# Altium PCB PC104_Breakout_Board.PcbDoc
Units mm, origin at the board's own origin, x right, y up, seen from the top; angles counter-clockwise.
Board outline 97.66 x 90.3 mm, 2 copper layers (Top Layer, Bottom Layer), stack 1.591 mm thick; 64 components, 67 nets, 295 pads, 54 vias.
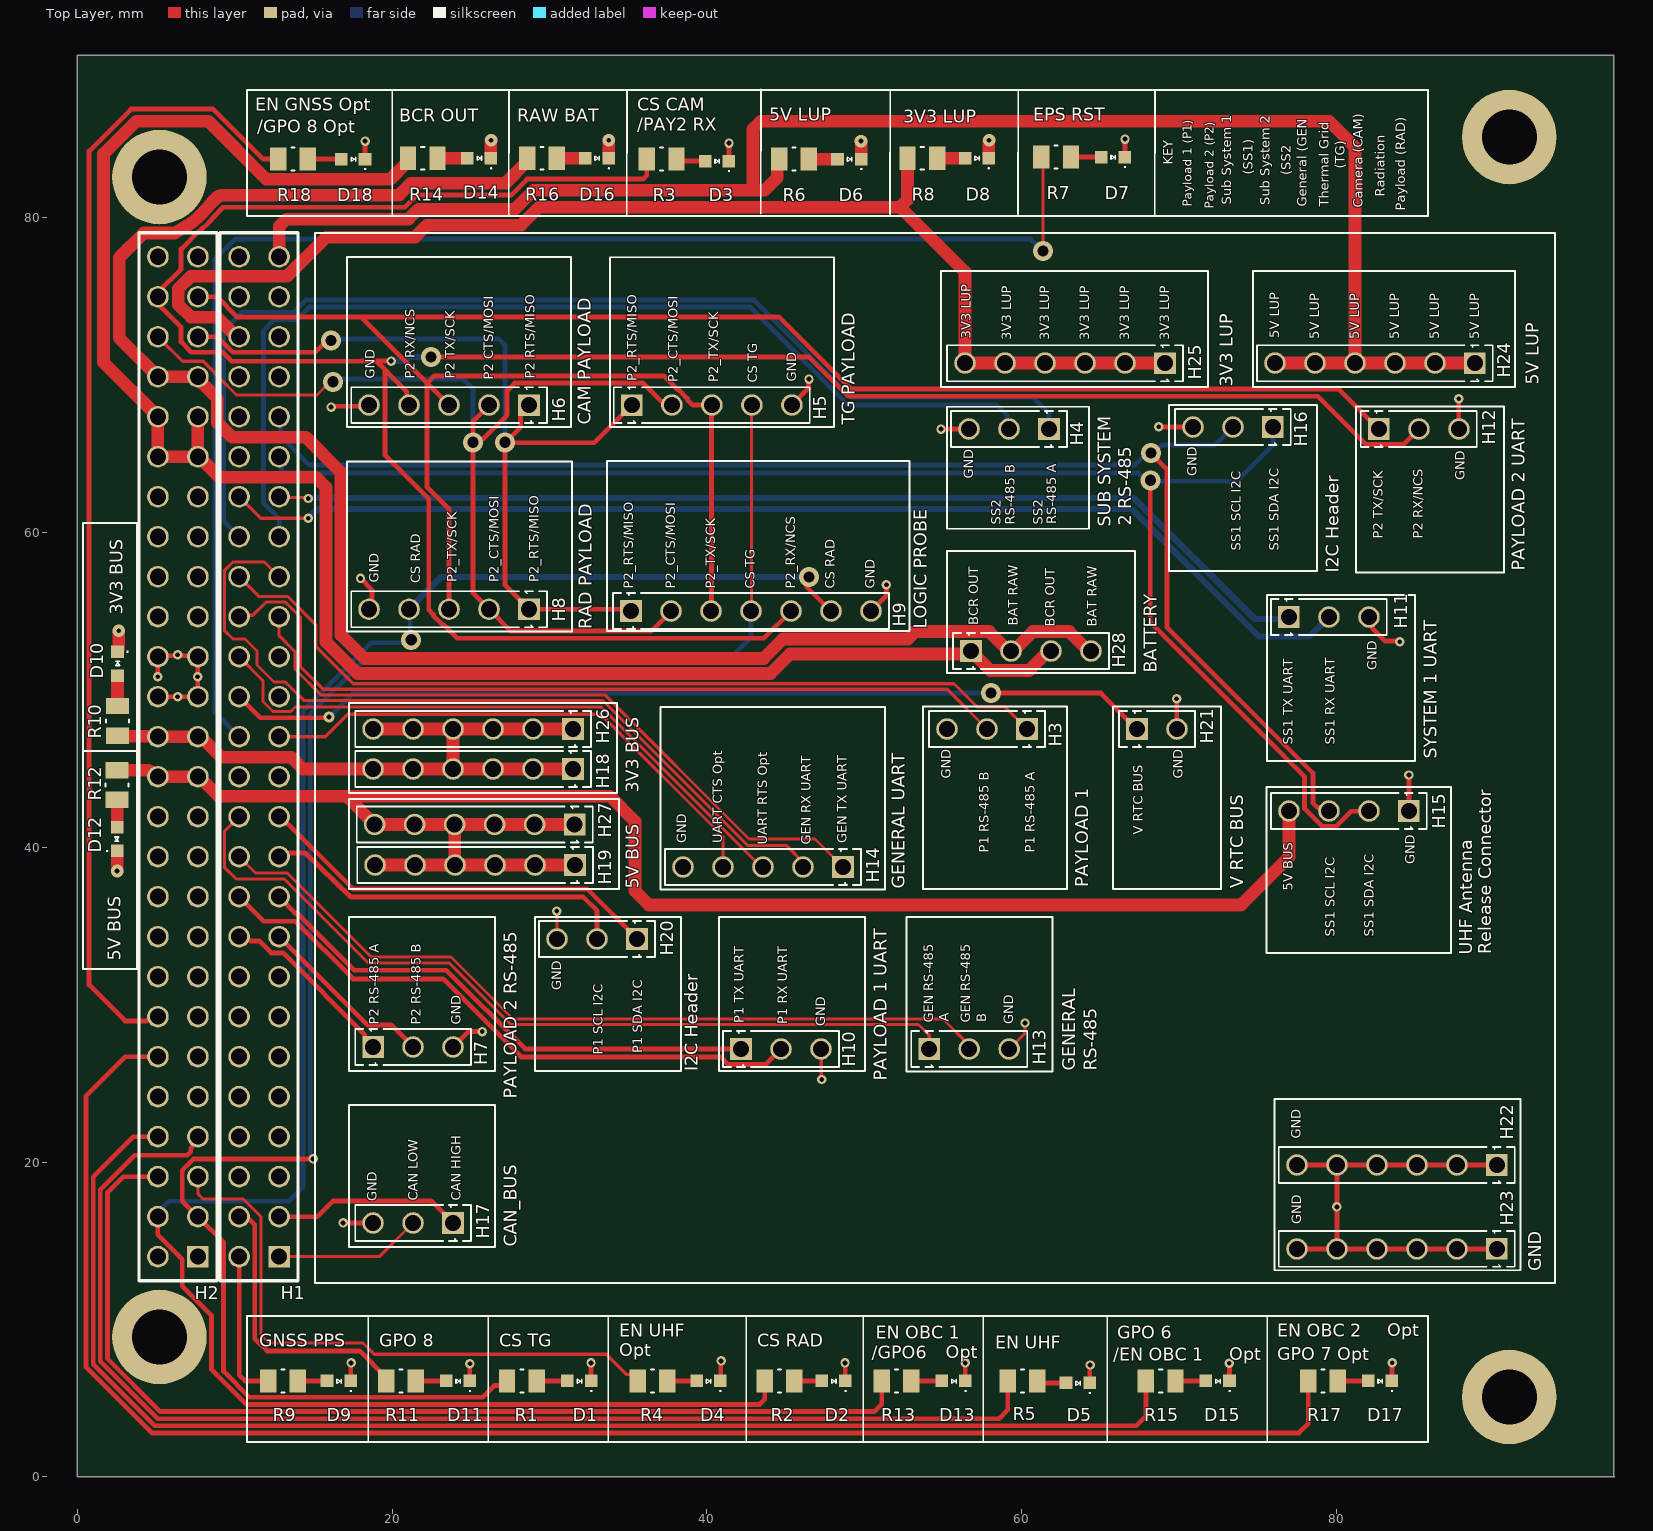
[diagram p0: Top Layer view]
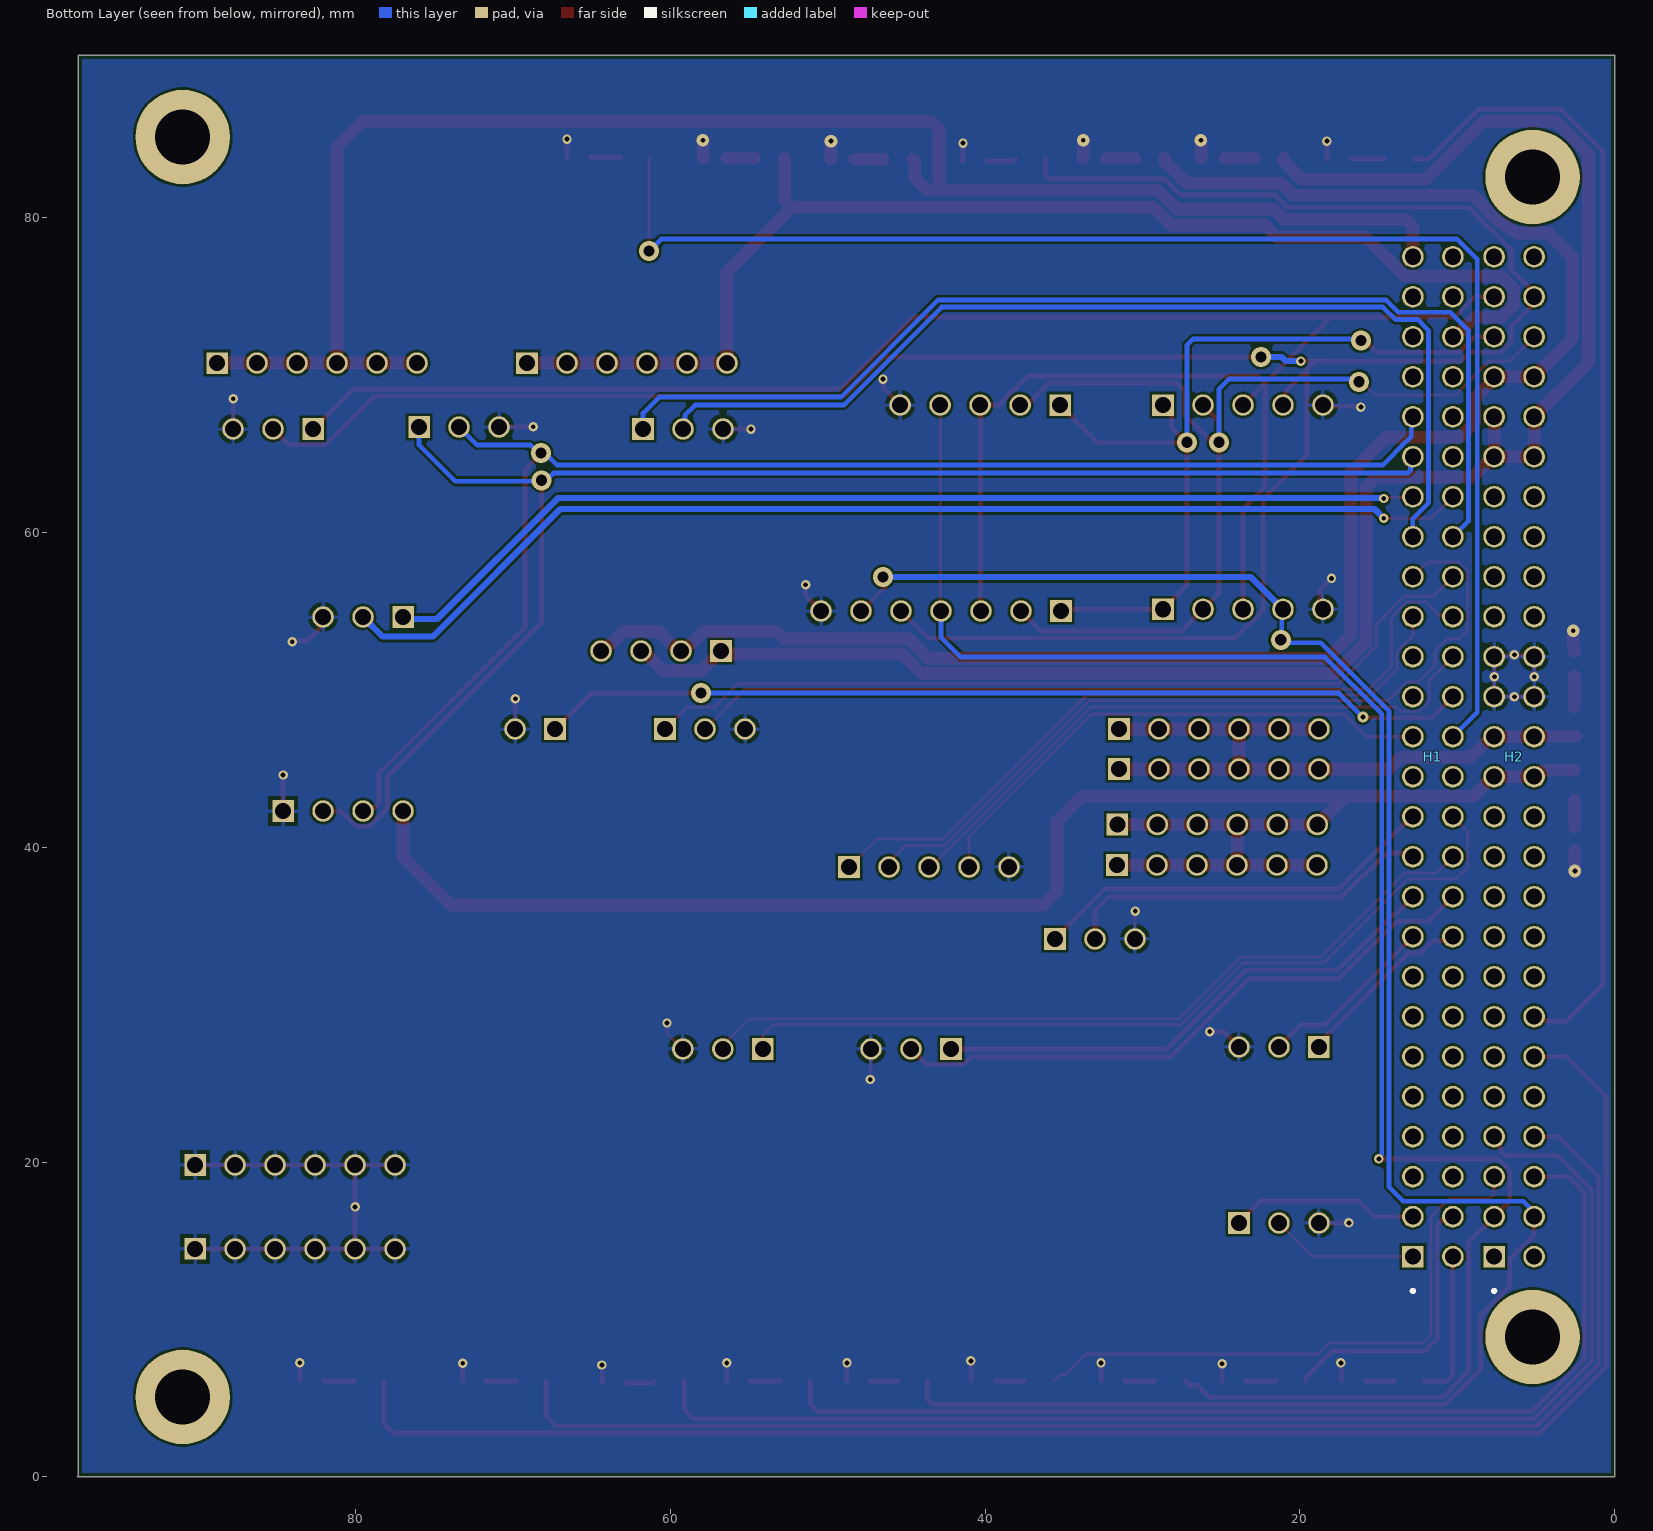
[diagram p1: Bottom Layer view, seen from below]
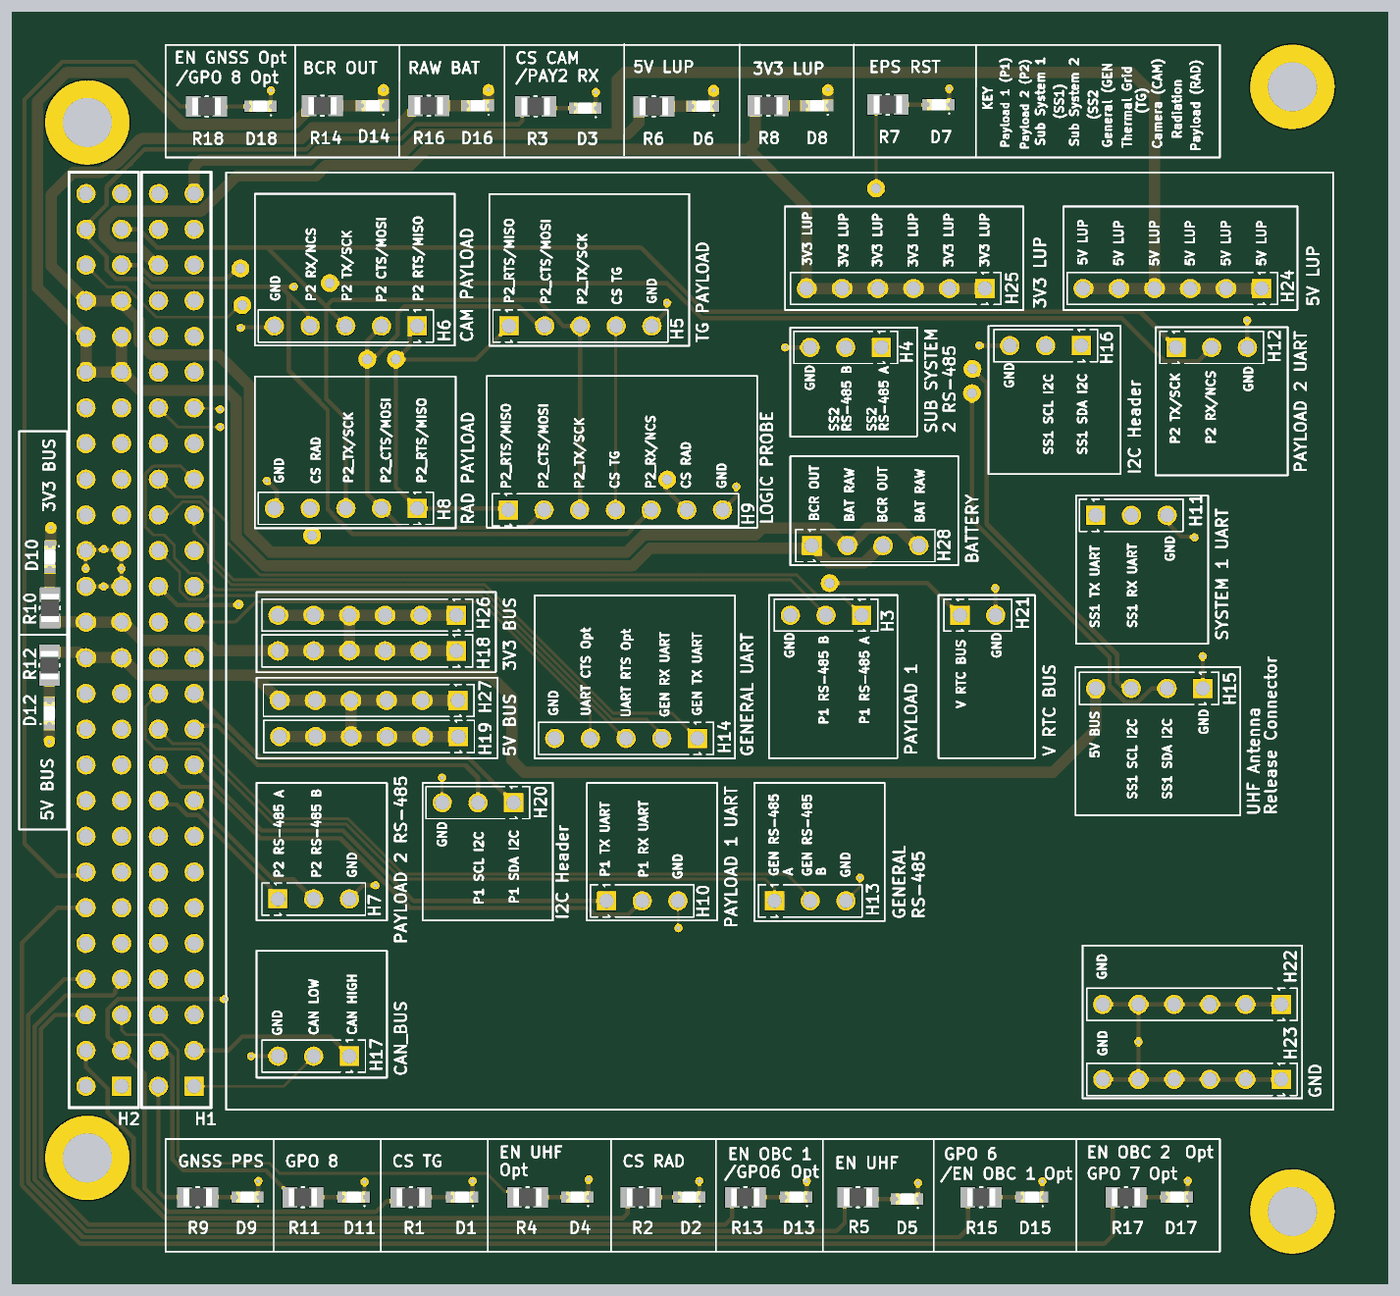
[diagram p2: 3D render of the assembled board from above, using the file's embedded part models]

## Layer stack, top to bottom
Top Solder: solder mask 0.0102, Solder Resist, Dk 3.5
Top Layer: signal copper 0.0356
Dielectric 1: dielectric 1.52, FR-4, Dk 4.8
Bottom Layer: signal copper 0.0356
Bottom Solder: solder mask 0.0102, Solder Resist, Dk 3.5

## Board outline
0,0 0,90.297 97.6,90.297 97.6,0.063 97.663,0

## Design rules (kind name [scope] priority, off if disabled: settings)
BoardOutlineClearance [All] p1: gap=0.254 ignorepadtopadclearanceinfootprint=FALSE except(0: Arc-SplitContinuation Track-SplitContinuation SMDPad-SplitContinuation THPad-SplitContinuation Via-SplitContinuation Fill-SplitContinuation Poly-SplitContinuation Region-SplitContinuation Text-SplitContinuation)
Clearance [All] p1: gap=0.152 ignorepadtopadclearanceinfootprint=FALSE
HoleSize [All] p1: absolutevalues=TRUE maxlimit=6.2 minlimit=0.3 maxpercent=80.000 minpercent=20.000
MinimumAnnularRing [All] p1: minimumring=0.15
MinimumSolderMaskSliver [All] p1: minsoldermaskwidth=0.1
PolygonConnect ViaConnect [IsVia] p1: connectstyle=Direct reliefconductorwidth=0.254 reliefentries=4 polygonreliefangle="90 Angle" airgapwidth=0.254
PolygonConnect [All] p2: connectstyle=Relief reliefconductorwidth=0.254 reliefentries=4 polygonreliefangle="90 Angle" airgapwidth=0.254
RoutingVias [All] p1: holewidth=0.3 width=0.6 viastyle="Through Hole" minholewidth=0.3 minwidth=0.5 maxholewidth=1 maxwidth=5
SilkToSilkClearance [All] p1: silktosilkclearance=0.1
SilkToSolderMaskClearance [IsPad] p1: minsilkscreentomaskgap=0.1 clearancetoexposedcopper=TRUE
SolderMaskExpansion [All] p1: expansion=0.051 istentingtop=FALSE
SupplyNets "Schematic Supply Nets_3" [InNet('5V_BUS')] p1: voltage=0.000
SupplyNets "Schematic Supply Nets_2" [InNet('3V3_BUS')] p2: voltage=0.000
SupplyNets "Schematic Supply Nets" [InNet('GND')] p3: voltage=0.000
Width [All] p1: maxlimit=0.8 minlimit=0.2 preferedwidth=0.4 toplayer_prefwidth=0.3 bottomlayer_minwidth=0.3 minimp=50.000000 maximp=50.000000 favimp=50.000000
26 further rules are at their usual default settings.

## Components (designator, comment, footprint, x,y, rotation, side; value= is the part's Value field where it differs from the comment)
D1 "LTST-C190 Series" LED_0603_1608M_0.80mm 31.892,6.096 r180 top
D2 "LTST-C190 Series" LED_0603_1608M_0.80mm 48.044,6.096 r180 top
D3 "LTST-C190 Series" LED_0603_1608M_0.80mm 40.64,83.566 r180 top
D4 "LTST-C190 Series" LED_0603_1608M_0.80mm 40.093,6.096 r180 top
D5 "LTST-C190 Series" LED_0603_1608M_0.80mm 63.554,5.969 r180 top
D6 "LTST-C190 Series" LED_0603_1608M_0.80mm 49.043,83.693 r180 top
D7 "LTST-C190 Series" LED_0603_1608M_0.80mm 65.789,83.82 r180 top
D8 "LTST-C190 Series" LED_0603_1608M_0.80mm 57.144,83.745 r180 top
D9 "LTST-C190 Series" LED_0603_1608M_0.80mm 16.625,6.096 r180 top
D10 "LTST-C190 Series" LED_0603_1608M_0.80mm 2.569,51.643 r270 top
D11 "LTST-C190 Series" LED_0603_1608M_0.80mm 24.19,6.096 r180 top
D12 "LTST-C190 Series" LED_0603_1608M_0.80mm 2.54,40.513 r90 top
D13 "LTST-C190 Series" LED_0603_1608M_0.80mm 55.667,6.096 r180 top
D14 "LTST-C190 Series" LED_0603_1608M_0.80mm 25.53,83.745 r180 top
D15 "LTST-C190 Series" LED_0603_1608M_0.80mm 72.438,6.096 r180 top
D16 "LTST-C190 Series" LED_0603_1608M_0.80mm 33.014,83.745 r180 top
D17 "LTST-C190 Series" LED_0603_1608M_0.80mm 82.745,6.096 r180 top
D18 "LTST-C190 Series" LED_0603_1608M_0.80mm 17.535,83.693 r180 top
H1 "ESQ-126-14-G-D" SAMTEC_ESQ-126-14-G-D 10.292,13.989 r270 bottom locked
H2 "ESQ-126-14-G-D" SAMTEC_ESQ-126-14-G-D 5.132,13.989 r270 bottom locked
H3 "HDR,2.54mm,1x3" HEADER_2.54MM_1x3PIN 57.785,47.498 r180 top
H4 "HDR,2.54mm,1x3" HEADER_2.54MM_1x3PIN 59.182,66.548 r180 top
H5 "HDR,2.54mm,1x5" HEADER_2.54MM_1x5PIN 40.313,68.072 r0 top
H6 "HDR,2.54mm,1x5" HEADER_2.54MM_1x5PIN 23.622,68.072 r180 top
H7 "HDR,2.54mm,1x3" HEADER_2.54MM_1x3PIN 21.336,27.305 r0 top
H8 "HDR,2.54mm,1x5" HEADER_2.54MM_1x5PIN 23.622,55.103 r180 top
H9 "HDR,2.54mm,1x7" HEADER_2.54MM_1x7PIN 42.799,54.991 r0 top
H10 "HDR,2.54mm,1x3" HEADER_2.54MM_1x3PIN 44.704,27.178 r0 top
H11 "HDR,2.54mm,1x3" HEADER_2.54MM_1x3PIN 79.502,54.61 r0 top
H12 "HDR,2.54mm,1x3" HEADER_2.54MM_1x3PIN 85.217,66.548 r0 top
H13 "HDR,2.54mm,1x3" HEADER_2.54MM_1x3PIN 56.656,27.178 r0 top
H14 "HDR,2.54mm,1x5" HEADER_2.54MM_1x5PIN 43.561,38.735 r180 top
H15 "HDR,2.54mm,1x4" HEADER_2.54MM_1x4PIN 80.772,42.291 r180 top
H16 "HDR,2.54mm,1x3" HEADER_2.54MM_1x3PIN 73.406,66.675 r180 top
H17 "HDR,2.54mm,1x3" HEADER_2.54MM_1x3PIN 21.336,16.129 r180 top
H18 "HDR,2.54mm,1x6" HEADER_2.54MM_1x6PIN 25.146,44.958 r180 top
H19 "HDR,2.54mm,1x6" HEADER_2.54MM_1x6PIN 25.273,38.862 r180 top
H20 "HDR,2.54mm,1x3" HEADER_2.54MM_1x3PIN 33.02,34.163 r180 top
H21 "HDR,2.54mm,1x2" HEADER_2.54MM_1x2PIN 68.58,47.498 r0 top
H22 "HDR,2.54mm,1x6" HEADER_2.54MM_1x6PIN 83.82,19.812 r180 top
H23 "HDR,2.54mm,1x6" HEADER_2.54MM_1x6PIN 83.82,14.478 r180 top
H24 "HDR,2.54mm,1x6" HEADER_2.54MM_1x6PIN 82.423,70.739 r180 top
H25 "HDR,2.54mm,1x6" HEADER_2.54MM_1x6PIN 62.738,70.739 r180 top
H26 "HDR,2.54mm,1x6" HEADER_2.54MM_1x6PIN 25.146,47.498 r180 top
H27 "HDR,2.54mm,1x6" HEADER_2.54MM_1x6PIN 25.251,41.434 r180 top
H28 "HDR,2.54mm,1x4" HEADER_2.54MM_1x4PIN 60.579,52.451 r0 top
R1 "2.2k" RESISTOR_0805_2012M-50N 28.245,6.096 r0 top
R2 "2.2k" RESISTOR_0805_2012M-50N 44.615,6.096 r0 top
R3 "2.2k" RESISTOR_0805_2012M-50N 37.125,83.693 r0 top
R4 "2.2k" RESISTOR_0805_2012M-50N 36.549,6.096 r0 top
R5 "2.2k" RESISTOR_0805_2012M-50N 60.049,6.096 r0 top
R6 "2.2k" RESISTOR_0805_2012M-50N 45.534,83.693 r0 top
R7 "2.2k" RESISTOR_0805_2012M-50N 62.177,83.82 r0 top
R8 "2.2k" RESISTOR_0805_2012M-50N 53.677,83.745 r0 top
R9 "2.2k" RESISTOR_0805_2012M-50N 13.081,6.096 r0 top
R10 "2.2k" RESISTOR_0805_2012M-50N 2.569,48.016 r90 top
R11 "2.2k" RESISTOR_0805_2012M-50N 20.57,6.096 r0 top
R12 "2.2k" RESISTOR_0805_2012M-50N 2.54,43.942 r270 top
R13 "2.2k" RESISTOR_0805_2012M-50N 52.047,6.096 r0 top
R14 "2.2k" RESISTOR_0805_2012M-50N 21.953,83.745 r0 top
R15 "2.2k" RESISTOR_0805_2012M-50N 68.818,6.096 r0 top
R16 "2.2k" RESISTOR_0805_2012M-50N 29.523,83.745 r0 top
R17 "2.2k" RESISTOR_0805_2012M-50N 79.125,6.096 r0 top
R18 "2.2k" RESISTOR_0805_2012M-50N 13.716,83.693 r0 top

## Footprints (in the part's own frame and the unit in brackets; to place one, negate y for a bottom-side part, rotate by r counter-clockwise, add the part's x,y. Pads: shape width x height; smd on the part's side, far side on the other; paste and mask are expansions set on the pad)
HEADER_2.54MM_1x2PIN [mm]
  rect 1.37x1.37 hole 1.02: 1(-1.27,0)
  round 1.37 hole 1.02: 2(1.27,0)
  silkscreen extent -2.41,-1.14 2.41,1.14, body extent -2.41,-1.14 2.41,1.14, height 8.2
HEADER_2.54MM_1x3PIN [mm]
  rect 1.37x1.37 hole 1.02: 1(-2.54,0)
  round 1.37 hole 1.02: 2(0,0) 3(2.54,0)
  silkscreen extent -3.68,-1.14 3.68,1.14, body extent -3.68,-1.14 3.68,1.14, height 8.2
HEADER_2.54MM_1x4PIN [mm]
  rect 1.37x1.37 hole 1.02: 1(-3.81,0)
  round 1.37 hole 1.02: 2(-1.27,0) 3(1.27,0) 4(3.81,0)
  silkscreen extent -4.95,-1.14 4.95,1.14, body extent -4.95,-1.14 4.95,1.14, height 8.2
HEADER_2.54MM_1x5PIN [mm]
  rect 1.37x1.37 hole 1.02: 1(-5.08,0)
  round 1.37 hole 1.02: 2(-2.54,0) 3(0,0) 4(2.54,0) 5(5.08,0)
  silkscreen extent -6.22,-1.14 6.22,1.14, body extent -6.21,-1.14 6.22,1.14, height 8.2
HEADER_2.54MM_1x6PIN [mm]
  rect 1.37x1.37 hole 1.02: 1(-6.35,0)
  round 1.37 hole 1.02: 2(-3.81,0) 3(-1.27,0) 4(1.27,0) 5(3.81,0) 6(6.35,0)
  silkscreen extent -7.49,-1.14 7.49,1.14, body extent -7.49,-1.14 7.49,1.14, height 8.2
HEADER_2.54MM_1x7PIN [mm]
  rect 1.37x1.37 hole 1.02: 1(-7.62,0)
  round 1.37 hole 1.02: 2(-5.08,0) 3(-2.54,0) 4(0,0) 5(2.54,0) 6(5.08,0) 7(7.62,0)
  silkscreen extent -8.76,-1.14 8.76,1.14, body extent -8.76,-1.14 8.76,1.14, height 8.2
LED_0603_1608M_0.80mm [mm] "LED, 0603 (1608 metric), 0.8mm high"
  rect 0.8x0.8 smd mask+0.051: A(0.75,0) C(-0.75,0)
  silkscreen extent -0.79,-0.12 0.13,0.66, body extent -0.8,-0.4 0.8,0.4, height 0.8
RESISTOR_0805_2012M-50N [mm] "Resistor, 0805 (2012 metric), nominal pads"
  rect 1.04x1.47 smd mask+0.051: 1(-0.94,0) 2(0.94,0)
  silkscreen extent -0.1,-0.72 0.1,0.72, body extent -1,-0.63 1,0.62, height 0.5
SAMTEC_ESQ-126-14-G-D [mm]
  rect 1.37x1.37 hole 1.02: 01(0,-2.54)
  round 1.37 hole 1.02: 02(0,0) 03(-2.54,-2.54) 04(-2.54,0) 05(-5.08,-2.54) 06(-5.08,0) 07(-7.62,-2.54) 08(-7.62,0) 09(-10.16,-2.54) 10(-10.16,0) 11(-12.7,-2.54) 12(-12.7,0) 13(-15.24,-2.54) 14(-15.24,0) 15(-17.78,-2.54) 16(-17.78,0) 17(-20.32,-2.54) 18(-20.32,0) 19(-22.86,-2.54) 20(-22.86,0) 21(-25.4,-2.54) 22(-25.4,0) 23(-27.94,-2.54) 24(-27.94,0) 25(-30.48,-2.54) 26(-30.48,0) 27(-33.02,-2.54) 28(-33.02,0) 29(-35.56,-2.54) 30(-35.56,0) 31(-38.1,-2.54) 32(-38.1,0) 33(-40.64,-2.54) 34(-40.64,0) 35(-43.18,-2.54) 36(-43.18,0) 37(-45.72,-2.54) 38(-45.72,0) 39(-48.26,-2.54) 40(-48.26,0) 41(-50.8,-2.54) 42(-50.8,0) 43(-53.34,-2.54) 44(-53.34,0) 45(-55.88,-2.54) 46(-55.88,0) 47(-58.42,-2.54) 48(-58.42,0) 49(-60.96,-2.54) 50(-60.96,0) 51(-63.5,-2.54) 52(-63.5,0)
  silkscreen extent 2.08,-2.64 2.27,-2.44

## Part data
D1 D2 D3 D4 D5 D6 D7 D8 D9 D10 D11 D12 D13 D14 D15 D16 D17 D18: "Diode - LED, 0603", Package=0603, Rated Voltage="5V Reverse", Temp Range="-30°C ~ 85°C", APSS Standard Part="APSS Standard", Supplier 1=Digikey
H1 H2: Package=None, Availability=Unavailable, MF=Samtec, MP=ESQ-126-14-G-D, Price=None
H3 H4 H7 H10 H11 H12 H13 H16 H17 H20: "Connector - 2.54mm, 1x3-pin"
H5 H6 H8 H14: "Connector - 2.54mm, 1x5-pin"
H9: "Connector - 2.54mm, 1x7-pin"
H15 H28: "Connector - 2.54mm, 1x4-pin"
H18 H19 H22 H23 H24 H25 H26 H27: "Connector - 2.54mm, 1x6-pin"
H21: "Connector - 2.54mm, 1x2-pin"
R1 R2 R3 R4 R5 R6 R7 R8 R9 R10 R11 R12 R13 R14 R15 R16 R17 R18: library part "Generic Resistor", "Passive - Resistor, Generic", Tolerance=5%

## Free pads (board coordinates)
  round 6 hole 3.5 mask+0.102: 4(5.232,8.89) 4(5.232,82.55) 4(90.957,5.08) 4(90.957,85.09)

## Via types
v1: diameter 0.6, hole 0.3, Top Layer to Bottom Layer, 36 vias
v2: diameter 1.27, hole 0.711, Top Layer to Bottom Layer, 11 vias
v3: diameter 0.8, hole 0.3, Top Layer to Bottom Layer, 6 vias
v4: diameter 0.7, hole 0.3, Top Layer to Bottom Layer, 1 vias

## Nets (pads, with @x,y where several pads share a name; then routed paths per layer and width w, separated by ;. In a path a pad name is that pad's centre, name@x,y a point inside that pad or via, vN(x,y) a via of type N, cw(c..) or ccw(c..) an arc to the next point about the centre after c; other vN are vias at no path point)
3V3_BUS: H2.27 H2.28 H18.1 H18.2 H18.3 H18.4 H18.5 H18.6 H26.1 H26.2 H26.3 H26.4 H26.5 H26.6 R10.1 | length 45.1
  Top Layer w0.8: R10.1@2.475,47.043 5.098,47.043 H2.28 H2.27 7.826,47.009 9.129,45.706 13.603,45.706 14.351,44.958 H18.5 H18.4 ; H26.6 H26.5 H26.4 ; H18.1 H18.2 H18.3 H18.4 ; H26.1 H26.2 H26.3 H26.4 ; H18.4 H26.4
3V3_LUP: H1.48 H25.1 H25.2 H25.3 H25.4 H25.5 H25.6 R8.1 | length 81.3
  Top Layer w0.8: H1.48 10.138,72.409 8.897,73.649 7.222,73.649 6.435,74.436 6.435,75.462 7.225,76.252 13.345,76.252 15.833,78.74 21.463,78.74 22.225,79.502 28.194,79.502 29.337,80.645 52.269,80.645 ; R8.1 52.737,81.114 52.269,80.645 ; H25.1 H25.2 H25.3 H25.4 H25.5 H25.6 56.388,76.526 52.269,80.645
5V_BUS: H2.25 H2.26 H15.4 H19.1 H19.2 H19.3 H19.4 H19.5 H19.6 H27.1 H27.2 H27.3 H27.4 H27.5 H27.6 R12.1 | length 115.3
  Top Layer w0.8: R12.1 4.565,44.882 4.978,44.469 H2.26 7.733,44.469 8.97,43.232 17.104,43.232 ; H19.6 H19.5 H19.4 ; H27.1 H27.2 H27.3 H27.4 ; H19.1 H19.2 H19.3 H19.4 ; H15.4 76.962,39.37 73.914,36.322 36.322,36.322 35.433,37.211 35.433,41.632 33.834,43.232 17.104,43.232 ; 17.104,43.232 H27.6 H27.5 H27.4 ; H27.4 23.992,41.423 23.992,38.873 H19.4
5V_LUP: H1.51 H24.1 H24.2 H24.3 H24.4 H24.5 H24.6 R6.1 | length 105.5
  Top Layer w0.8: H1.51 12.832,79.414 13.301,79.883 21.059,79.883 21.694,80.518 27.813,80.518 29.016,81.721 42.926,81.721 ; R6.1 44.474,83.573 44.474,82.511 43.684,81.721 42.926,81.721 ; H24.6 H24.1 ; H24.4 81.153,84.455 79.502,86.106 43.434,86.106 42.926,85.598 42.926,81.721
.: 
BAT_RAW: H2.45 H2.46 H28.2 H28.4 R16.1 | length 113.1
  Top Layer w0.8: R16.1 28.583,83.53 27.222,82.169 21.209,82.169 20.447,81.407 9.2,81.407 8.965,81.332 8.553,80.92 7.858,80.157 cw(c5.232,82.55) 7.049,79.497 6.209,78.998 5.547,78.998 4.241,78.998 2.667,77.424 2.667,72.334 H2.46 H2.45 7.672,69.715 8.912,68.474 8.912,66.959 9.845,66.026 14.531,66.026 16.764,63.793 16.764,53.467 18.253,51.978 43.596,51.978 44.831,53.213 52.755,53.213 53.231,53.688 57.917,53.688 59.155,52.451 H28.2 59.463,52.451 60.701,53.688 62.997,53.688 64.235,52.451 H28.4
BCR_OUT: H2.41 H2.42 H2.43 H2.44 H28.1 H28.3 R14.1 | length 115.4
  Top Layer w0.8: H2.43 H2.41 ; R14.1 21.013,83.53 19.889,82.406 12.027,82.406 8.33,86.102 3.761,86.102 1.68,84.021 1.68,70.781 H2.44 H2.42 H2.41 ; H28.3 61.695,52.451 60.457,51.214 58.006,51.214 H28.1 56.579,52.261 45.276,52.261 44.04,51.025 17.809,51.025 15.812,53.022 15.812,62.841 15.166,63.486 9.035,63.486 7.733,64.789 H2.41
CAN_HIGH: H1.03 H17.1 | length 12
  Top Layer w0.3: H1.03 15.259,16.529 16.256,17.526 22.479,17.526 H17.1
CAN_LOW: H1.01 H17.2 | length 9.4
  Top Layer w0.2: H1.01 19.196,13.989 H17.2
CS_RAD: H2.04 H8.4 H9.6 R2.1 | length 128.7
  Top Layer w0.3: H2.04 5.132,15.385 6.685,13.833 6.685,12.108 8.534,10.258 8.534,6.828 10.756,4.606 43.341,4.606 43.675,4.94 R2.1 ; v2(46.482,57.15) 46.355,57.023 46.355,56.515 H9.6
  Bottom Layer w0.3: H2.04 5.132,16.816 5.832,17.516 13.452,17.516 14.351,18.415 14.351,48.646 18.685,52.98 21.036,52.98 21.187,53.13 v2(21.222,53.165) ; H8.4 21.152,55.034 v2@21.152,53.165
  Bottom Layer w0.4: H8.4 23.129,57.15 v2(46.482,57.15)
CS_TG: H2.03 H5.4 H9.4 R1.1 | length 114.7
  Top Layer w0.2: H9.4 42.826,55.018 42.826,68.045 H5.4
  Top Layer w0.3: v1(14.986,20.193) 7.4,20.193 6.685,19.478 6.685,17.516 H2.03 9.305,14.896 9.305,6.697 10.943,5.059 25.76,5.059 26.511,5.81 27.019,5.81 R1.1
  Bottom Layer w0.3: v1(14.986,20.193) 14.986,20.274 14.803,20.457 14.803,48.458 18.415,52.07 41.529,52.07 42.799,53.34 H9.4
EN_GNSS_Opt/GPO8_Opt: H2.14 R18.1 | length 72.8
  Top Layer w0.3: H2.14 4.927,29.024 4.49,29.024 4.421,28.956 3.048,28.956 0.762,31.242 0.762,84.201 3.429,86.868 8.636,86.868 11.811,83.693 R18.1
EN_OBC_1/GPO6_Opt: H2.06 R13.1 | length 66.4
  Top Layer w0.3: H2.06 2.94,19.069 1.93,18.059 1.93,7.522 5.298,4.154 50.636,4.154 51.107,4.625 R13.1
EN_OBC_1_opt/GPO6: H2.08 R15.1 | length 88
  Top Layer w0.3: H2.08 3.575,21.609 1.025,19.059 1.025,7.147 4.923,3.249 67.268,3.249 67.878,3.858 R15.1
EN_OBC_2_Opt/GPO7_Opt: H2.12 R17.1 | length 105.1
  Top Layer w0.3: H2.12 3.067,26.689 0.572,24.194 0.572,6.96 4.738,2.794 77.597,2.794 78.185,3.382 R17.1
EN_UHF: H2.07 R5.1 | length 80
  Top Layer w0.3: H2.07 7.672,21.319 7.213,20.86 7.213,20.646 7.001,20.434 3.665,20.434 1.477,18.246 1.477,7.335 5.111,3.701 58.554,3.701 59.109,4.256 R5.1
EN_UHF_Opt: H2.05 R4.1 | length 38.4
  Top Layer w0.2: H2.05 7.672,17.982 8.001,17.653 10.564,17.653 11.684,16.533 11.684,13.843 11.684,9.017 12.192,8.509 18.161,8.509 18.879,7.791 33.611,7.791 34.906,6.496 35.209,6.496 R4.1
EPS_RST: H1.28 R7.1 | length 90.4
  Top Layer w0.2: R7.1 61.341,83.716 v2(61.341,77.851)
  Bottom Layer w0.3: H1.28 8.752,48.549 8.752,77.346 9.883,78.476 9.896,78.476 10.033,78.613 60.579,78.613 v2(61.341,77.851)
GEN_RS-485_A: H1.24 H13.1 | length 53.7
  Top Layer w0.2: H1.24 9.355,40.992 9.355,38.723 10.105,37.973 13.149,37.973 18.483,32.639 23.632,32.639 27.54,28.731 53.438,28.731 54.116,28.053 H13.1
GEN_RS-485_B: H1.22 H13.2 | length 51.6
  Top Layer w0.2: H1.22 11.327,38.354 12.446,38.354 13.354,38.354 18.688,33.02 23.749,33.02 27.686,29.083 54.991,29.083 56.656,27.418 H13.2
GEN_RX_UART: H1.35 H14.2 | length 51.6
  Top Layer w0.2: H1.35 11.895,58.106 9.904,58.106 9.355,57.557 9.355,53.764 9.906,53.213 10.668,53.213 11.43,52.451 11.43,51.562 12.506,50.486 13.22,50.486 14.391,49.316 33.371,49.316 38.323,44.363 42.583,40.104 45.045,40.104 45.133,40.016 46.101,39.048 H14.2
GEN_TX_UART: H1.33 H14.1 | length 43.7
  Top Layer w0.2: H1.33 12.832,53.415 13.839,52.407 13.839,51.312 15.483,49.668 33.517,49.668 42.672,40.513 46.863,40.513 H14.1
GND: D1.C D2.C D3.C D4.C D5.C D6.C D7.C D8.C D9.C D10.C D11.C D12.C D13.C D14.C D15.C D16.C D17.C D18.C H2.29 H2.30 H2.31 H2.32 H3.3 H4.3 H5.5 H6.5 H7.3 H8.5 H9.7 H10.3 H11.3 H12.3 H13.3 H14.5 H15.1 H16.3 H17.3 H20.3 H21.2 H22.1 H22.2 H22.3 H22.4 H22.5 H22.6 H23.1 H23.2 H23.3 H23.4 H23.5 H23.6 | length 93.3
  Top Layer w0.2: H6.5@18.459,67.989 H6.5 H6.5@18.669,67.945 ; v1(30.458,35.936) 30.469,35.926 30.469,34.174 H20.3 ; H10.3 47.264,27.158 47.264,25.261 v1(47.284,25.241) ; H13.3 60.198,28.18 v1(60.198,28.829)
  Top Layer w0.3: v1(5.115,50.81) 5.124,50.819 5.124,52.081 H2.32 5.193,52.15 6.328,52.15 v1(6.385,52.207) 6.443,52.15 7.611,52.15 H2.31 7.664,52.081 7.664,50.819 v1(7.655,50.81) 7.664,50.802 7.664,49.557 H2.29 7.668,49.545 6.389,49.545 v1(6.385,49.54) 6.381,49.545 5.136,49.545 H2.30 ; v1@16.251,67.989 H6.5@18.459,67.989 ; v1(16.891,16.129) H17.3@19.304,16.129 ; D9.C 17.388,6.109 17.388,7.228 v1(17.4,7.24) ; v1(18,57.061) 18.723,56.338 18.723,55.318 H8.5@18.796,55.245 ; D18.C 18.287,83.694 v1(18.288,84.836) v1(18.288,84.836) ; H7.3 24.856,28.285 v1(25.728,28.285) ; D11.C 24.946,6.102 24.946,7.189 v1(24.952,7.195) ; v3@26.286,84.882 v3(26.292,84.888) ; v1(32.639,7.239) 32.64,7.238 32.64,6.097 D1.C ; v3@33.765,84.886 v3(33.767,84.888) ; D4.C 40.869,6.122 40.869,7.341 v1(40.895,7.367) ; D3.C 41.396,83.572 41.396,84.703 v1(41.402,84.709) ; H5.5 46.444,69.123 46.444,69.685 v1(46.482,69.723) ; v1(48.769,7.24) 48.782,7.228 48.782,6.109 D2.C ; v3(49.784,84.836) v3@49.789,84.831 ; H9.7 51.399,55.971 v1(51.399,56.652) ; v1(54.864,66.548) H4.3 ; v1(56.4,7.24) 56.408,7.232 56.408,6.105 D13.C ; D5.C 64.318,5.983 64.318,7.094 v1(64.331,7.108) ; D7.C 66.543,83.825 66.543,84.958 v1(66.548,84.963) ; v1(68.688,66.689) 68.695,66.682 70.859,66.682 H16.3 ; v1(69.825,49.428) 69.838,49.416 69.838,47.51 H21.2 ; v1(73.171,7.219) 73.179,7.211 73.179,6.104 D15.C ; H23.6 H23.5 ; H22.6 H22.5 ; H11.3 82.247,54.405 82.247,53.897 83.055,53.089 83.938,53.089 v1(83.995,53.031) ; H22.4@82.548,19.81 H22.4 ; D17.C 83.505,6.106 83.505,7.248 v1(83.515,7.258) ; H15.1 v1(84.582,44.577) ; H23.2@87.556,14.552 H23.2 ; v1(87.738,68.467) 87.747,68.458 87.747,66.558 H12.3 ; H23.1 H23.2 ; H22.1 H22.2 H22.3 H22.4 ; H23.5 H23.4 H23.3 H23.2 ; H23.5 v1(80.01,17.145) H22.5 ; H22.5 H22.4
  Top Layer w0.8: v3(2.54,38.481) D12.C ; D10.C 2.569,52.52 2.642,52.593 v3(2.642,53.74) ; D14.C 26.28,84.876 v3(26.292,84.888) ; D16.C 33.764,84.884 v3(33.767,84.888) ; v3(49.784,84.836) 49.793,84.827 D6.C ; D8.C 57.894,84.861 v3(57.919,84.886)
  other v1: 16.129,67.945
GNSS_PPS_Opt: H1.02 R9.1 | length 9.5
  Top Layer w0.3: H1.02 10.292,6.472 10.668,6.096 R9.1
GPO8: H1.04 R11.1 | length 18
  Top Layer w0.3: H1.04 10.497,16.324 10.981,16.324 11.279,16.026 11.279,8.787 12.065,8.001 17.94,8.001 19.63,6.311 R11.1
NetD1_A: D1.A R1.2 | length 2
  Top Layer w0.3: R1.2 D1.A
NetD2_A: D2.A R2.2 | length 1.7
  Top Layer w0.3: R2.2 D2.A
NetD3_A: D3.A R3.2 | length 1.9
  Top Layer w0.3: R3.2 38.192,83.566 D3.A
NetD4_A: D4.A R4.2 | length 1.9
  Top Layer w0.3: R4.2 D4.A
NetD5_A: D5.A R5.2 | length 1.9
  Top Layer w0.3: R5.2 61.116,5.969 D5.A
NetD6_A: D6.A R6.2 | length 1.8
  Top Layer w0.8: R6.2 D6.A
NetD7_A: D7.A R7.2 | length 1.9
  Top Layer w0.3: R7.2 D7.A
NetD8_A: D8.A R8.2 | length 1.8
  Top Layer w0.8: R8.2 D8.A
NetD9_A: D9.A R9.2 | length 1.9
  Top Layer w0.3: R9.2 D9.A
NetD10_A: D10.A R10.2 | length 2
  Top Layer w0.8: R10.2@2.569,48.895 R10.2 D10.A
NetD11_A: D11.A R11.2 | length 1.9
  Top Layer w0.3: R11.2 D11.A
NetD12_A: D12.A R12.2 | length 1.7
  Top Layer w0.8: D12.A R12.2
NetD13_A: D13.A R13.2 | length 1.9
  Top Layer w0.3: R13.2 D13.A
NetD14_A: D14.A R14.2 | length 1.9
  Top Layer w0.8: R14.2 D14.A
NetD15_A: D15.A R15.2 | length 1.9
  Top Layer w0.3: R15.2 D15.A
NetD16_A: D16.A R16.2 | length 1.8
  Top Layer w0.8: R16.2 D16.A
NetD17_A: D17.A R17.2 | length 1.9
  Top Layer w0.3: R17.2 D17.A
NetD18_A: D18.A R18.2 | length 2.1
  Top Layer w0.3: R18.2 D18.A
PAY1_RS-485_A: H1.36 H3.1 | length 54.8
  Top Layer w0.2: H1.36 11.542,55.919 13.366,55.919 15.159,54.126 15.159,52.752 17.538,50.373 55.686,50.373 57.098,48.961 57.157,48.902 58.033,48.897 ccw(c58.039,49.784) 58.046,48.897 58.755,48.902 58.921,48.902 58.98,48.843 H3.1
PAY1_RS-485_B: H1.34 H3.2 | length 53.1
  Top Layer w0.2: H1.34 10.384,54.721 11.16,54.721 12.005,55.566 13.22,55.566 14.192,54.595 14.192,51.458 15.629,50.021 55.262,50.021 H3.2
PAY1_RX_UART: H1.20 H10.2 | length 39.2
  Top Layer w0.3: H1.20 11.845,35.296 13.853,35.296 17.526,31.623 23.242,31.623 28.195,26.67 40.874,26.67 41.354,26.191 43.717,26.191 H10.2
PAY1_SCL_I2C: H1.21 H20.2 | length 23.6
  Top Layer w0.3: H1.21 13.067,39.624 14.478,39.624 17.375,36.83 32.131,36.83 33.02,35.941 H20.2
PAY1_SDA_I2C: H1.23 H20.1 | length 25.9
  Top Layer w0.3: H1.23 12.935,41.929 17.526,37.338 32.385,37.338 H20.1
PAY1_TX_UART: H1.19 H10.1 | length 33.3
  Top Layer w0.3: H1.19 13.932,35.749 14.04,35.749 17.61,32.179 23.447,32.179 28.448,27.178 H10.1
PAY2_CTS/MOSI: H2.48 H5.2 H6.2 H8.2 H9.2 | length 67.8
  Top Layer w0.2: H2.48 6.692,70.849 8.018,70.849 8.961,69.906 8.961,69.874 10.128,68.707 15.24,68.707 16.081,69.548 v2(16.256,69.548)
  Top Layer w0.3: v2@25.146,65.659 25.408,65.659 25.685,65.936 25.804,65.936 27.305,67.437 27.305,68.991 27.783,69.469 35.941,69.469 37.133,68.277 37.569,68.277 H5.2 ; H6.2 25.146,67.056 25.146,56.119 H8.2 27.544,53.721 36.449,53.721 H9.2
  Bottom Layer w0.3: v2(16.256,69.548) 16.431,69.723 24.511,69.723 25.146,69.088 v2(25.146,65.707)
PAY2_RS-485_A: H1.18 H7.1 | length 11.6
  Top Layer w0.3: H1.18 10.497,34.104 10.934,34.104 11.003,34.036 11.557,34.036 12.319,33.274 13.081,33.274 18.261,28.094 18.261,27.84 H7.1
PAY2_RS-485_B: H1.17 H7.2 | length 11.4
  Top Layer w0.3: H1.17 18.439,28.702 19.939,28.702 H7.2
PAY2_RTS/MISO: H2.47 H5.1 H6.1 H8.1 H9.1 | length 56.4
  Top Layer w0.3: H2.47 8.896,72.409 9.883,71.422 15.125,71.422 15.868,72.164 v2(16.129,72.164) ; v2@27.183,65.683 32.844,65.683 H5.1 ; v2(27.183,65.707) 27.183,56.622 H8.1 35.067,55.103 H9.1 ; v2@27.195,65.695 28.167,66.667 28.167,67.537 H6.1
  Bottom Layer w0.3: v2(16.129,72.164) 16.228,72.263 26.797,72.263 27.178,71.882 27.178,65.712 v2(27.183,65.707)
PAY2_RX/NCS: H2.50 H6.4 H9.5 H12.2 R3.1 | length 166.1
  Top Layer w0.3: 19.011,70.856 19.558,70.309 ; v1(19.939,70.866) 18.044,70.866 18.034,70.856 9.808,70.856 9.243,71.422 7.263,71.422 6.604,72.081 6.604,73.025 5.337,74.292 5.337,74.744 H2.50 5.132,75.236 6.604,76.708 6.604,77.978 7.736,79.11 ccw(c5.232,82.55) 8.349,79.654 9.17,80.538 9.174,80.542 9.262,80.63 20.813,80.63 21.59,81.407 27.559,81.407 28.575,82.423 35.941,82.423 36.185,82.667 R3.1 ; H6.4 20.936,68.218 20.936,68.931 20.017,69.85 19.558,70.309 ; v2(22.479,71.12) 46.482,71.12 48.966,68.636 78.792,68.636 81.867,65.561 84.23,65.561 H12.2 ; H9.5 43.617,53.269 24.131,53.269 23.284,54.116 23.213,54.116 22.635,54.694 22.635,54.765 22.326,55.074 22.326,62.124 21.773,62.678 21.773,62.682 19.558,64.897 19.558,70.309
  Bottom Layer w0.4: v1(19.939,70.866) 20.908,70.866 21.162,71.12 v2(22.479,71.12)
PAY2_RX/NCS_Opt/COMM_RX_Opt: H2.21
PAY2_TX/SCK: H2.49 H5.3 H6.3 H8.3 H9.3 H12.1 | length 133.5
  Top Layer w0.3: H2.49 8.896,74.949 10.185,73.66 18.034,73.66 ; H8.3 23.622,61.468 22.225,62.865 22.225,69.469 ; H6.3 22.225,69.469 ; H9.3 40.286,55.018 40.286,68.045 H5.3 39.099,68.072 38.761,68.41 38.761,68.481 38.182,69.059 38.112,69.059 37.25,69.921 22.677,69.921 22.225,69.469 ; H12.1 80.137,69.088 49.154,69.088 44.582,73.66 18.034,73.66 ; 18.034,73.66 22.225,69.469
PAY2_TX/SCK_Opt/COMM_TX_Opt: H2.22
SYS2_RS-485_A: H1.38 H4.1 | length 70.7
  Bottom Layer w0.3: H1.38 9.305,60.696 9.305,72.818 10.448,73.962 13.759,73.962 14.545,74.747 42.982,74.747 49.149,68.58 60.706,68.58 61.722,67.564 H4.1
SYS2_RS-485_B: H1.37 H4.2 | length 65.1
  Bottom Layer w0.3: H1.37 12.832,60.853 11.845,61.84 11.845,72.818 12.536,73.509 13.946,73.509 14.732,74.295 42.762,74.295 48.985,68.072 58.42,68.072 59.06,67.432 59.06,66.67 H4.2
SYS_RX_UART: H1.40 H11.2 | length 73.9
  Top Layer w0.2: H1.40 11.655,60.886 v1(14.684,60.886)
  Bottom Layer w0.4: v1(14.684,60.886) 15.266,61.468 66.966,61.468 75.067,53.367 78.259,53.367 H11.2
SYS_SCL_I2C: H1.43 H15.3 H16.2 | length 91
  Top Layer w0.3: v2(68.199,65.024) 69.215,64.008 69.215,53.975 78.486,44.704 78.486,42.799 78.789,42.496 79.297,42.496 H15.3
  Bottom Layer w0.3: H1.43 12.942,67.219 12.942,66.052 13.218,65.776 13.241,65.776 14.755,64.262 67.183,64.262 v2@67.945,65.024 ; v2(68.199,65.024) 68.352,65.024 68.86,65.532 72.258,65.532 72.443,65.716 72.447,65.716 H16.2
SYS_SDA_I2C: H1.41 H15.2 H16.1 | length 96.1
  Top Layer w0.3: v2(68.161,63.291) 68.161,54.267 76.552,45.876 ; 76.581,45.847 77.949,44.479 77.949,42.447 79.093,41.304 79.929,41.304 80.907,42.282 82.033,42.282 H15.2
  Bottom Layer w0.3: H1.41 12.978,64.643 12.978,63.93 13.154,63.754 67.406,63.754 67.684,63.476 67.976,63.476 v2(68.161,63.291) 68.216,63.236 73.65,63.236 75.946,65.532 H16.1
SYS_SDL_I2C: 
SYS_TX_UART: H1.39 H11.1 | length 67.4
  Top Layer w0.2: H1.39 12.871,62.21 14.611,62.21 v1(14.684,62.136)
  Bottom Layer w0.4: v1(14.684,62.136) 14.719,62.171 67.115,62.171 74.803,54.483 76.835,54.483 H11.1
UART_CTS_Opt: H1.27 H14.4 | length 33.9
  Top Layer w0.2: H1.27 15.764,47.009 17.19,48.435 33.255,48.435 41.021,40.669 H14.4
UART_RTS_Opt: H1.32 H14.3 | length 39.8
  Top Layer w0.2: H1.32 11.811,50.57 11.811,49.244 12.444,48.612 13.56,48.612 13.843,48.895 33.293,48.895 43.453,38.735 H14.3
V_RTC_BUS: H1.30 H21.1 | length 59.2
  Top Layer w0.3: H1.30 11.632,48.209 15.951,48.209 v4(16.002,48.26) ; v2(58.039,49.784) 65.024,49.784 H21.1
  Bottom Layer w0.3: v4(16.002,48.26) 17.526,49.784 v2(58.039,49.784)
pads on no net: H1.05 H1.06 H1.07 H1.08 H1.09 H1.10 H1.11 H1.12 H1.13 H1.14 H1.15 H1.16 H1.25 H1.26 H1.29 H1.31 H1.42 H1.44 H1.45 H1.46 H1.47 H1.49 H1.50 H1.52 H2.01 H2.02 H2.09 H2.10 H2.11 H2.13 H2.15 H2.16 H2.17 H2.18 H2.19 H2.20 H2.23 H2.24 H2.33 H2.34 H2.35 H2.36 H2.37 H2.38 H2.39 H2.40 H2.51 H2.52

## Polygon pours and split planes (outlines as drawn)
GND on Bottom Layer "GND_L02_P001" (solid, remove dead copper, pour order 1): 0,0 97.598,0 97.598,90.296 0,90.296 0,0

## Other copper
Top Layer:

## Silkscreen, mask and mechanical layers (free items; w line width, h text height)
Top Overlay:
  lines w0.1: 18.493,2.304 18.493,10.178 ; 20.017,80.155 20.017,88.029 ; 26.113,2.304 26.113,10.178 ; 27.418,80.084 27.432,88.011 ; 33.733,2.304 33.733,10.178 ; 34.911,80.084 34.925,88.011 ; 42.496,2.304 42.496,10.178 ; 43.42,80.211 43.434,88.138 ; 49.936,2.278 49.936,10.152 ; 51.625,80.181 51.639,88.108 ; 57.556,2.278 57.556,10.152 ; 59.753,80.181 59.767,88.108 ; 65.43,2.278 65.43,10.152 ; 68.439,80.084 68.453,88.011 ; 75.59,2.278 75.59,10.152
  lines w0.125: 0.381,32.258 3.81,32.258 3.81,46.102 0.381,46.102 0.381,32.258 ; 0.381,46.101 3.81,46.101 3.81,60.58 0.381,60.58 0.381,46.101 ; 10.798,80.065 85.798,80.065 85.798,88.065 10.798,88.065 10.798,80.065 ; 10.799,2.232 85.799,2.232 85.799,10.233 10.799,10.233 10.799,2.232 ; 15.113,12.319 93.853,12.319 93.853,78.994 15.113,78.994 15.113,12.319 ; 17.145,53.689 31.435,53.689 31.435,64.484 17.145,64.484 17.145,53.689 ; 17.145,66.675 31.369,66.675 31.369,77.47 17.145,77.47 17.145,66.675 ; 17.272,14.605 26.543,14.605 26.543,23.622 17.272,23.622 17.272,14.605 ; 17.272,25.781 26.543,25.781 26.543,35.56 17.272,35.56 17.272,25.781 ; 17.272,37.338 34.417,37.338 34.417,43.053 17.272,43.053 17.272,37.338 ; 17.272,43.434 34.29,43.434 34.29,49.149 17.272,49.149 17.272,43.434 ; 29.083,25.781 38.354,25.781 38.354,35.56 29.083,35.56 29.083,25.781 ; 33.655,53.721 52.876,53.721 52.876,64.516 33.655,64.516 33.655,53.721 ; 33.831,66.663 48.055,66.663 48.055,77.458 33.831,77.458 33.831,66.663 ; 37.048,37.309 51.308,37.309 51.308,48.895 37.048,48.895 37.048,37.309 ; 40.767,25.781 50.038,25.781 50.038,35.56 40.767,35.56 40.767,25.781 ; 52.684,25.752 61.955,25.752 61.955,35.56 52.684,35.56 52.684,25.752 ; 53.721,37.338 62.865,37.338 62.865,48.924 53.721,48.924 53.721,37.338 ; 54.864,69.215 71.82,69.215 71.82,76.581 54.864,76.581 54.864,69.215 ; 55.235,60.215 64.262,60.215 64.262,67.962 55.235,67.962 55.235,60.215 ; 55.245,51.054 67.183,51.054 67.183,58.801 55.245,58.801 55.245,51.054 ; 65.786,37.338 72.644,37.338 72.644,48.925 65.786,48.925 65.786,37.338 ; 69.342,57.531 78.74,57.531 78.74,68.072 69.342,68.072 69.342,57.531 ; 74.676,69.215 91.313,69.215 91.313,76.581 74.676,76.581 74.676,69.215 ; 75.532,33.266 87.249,33.266 87.249,43.807 75.532,43.807 75.532,33.266 ; 75.565,45.466 84.963,45.466 84.963,56.007 75.565,56.007 75.565,45.466 ; 76.034,13.126 91.656,13.126 91.656,24.003 76.034,24.003 76.034,13.126 ; 81.232,57.442 90.63,57.442 90.63,67.983 81.232,67.983 81.232,57.442
  text "EN GNSS Opt" at 11.326,86.777 h0.8
  text "CS CAM" at 35.583,86.764 h0.8
  text "5V LUP" at 43.965,86.129 h0.8
  text "EPS RST" at 60.737,86.129 h0.8
  text "BCR OUT" at 20.468,86.054 h0.8
  text "RAW BAT" at 27.948,86.054 h0.8
  text "3V3 LUP" at 52.474,86.002 h0.8
  text "/PAY2 RX" at 35.583,85.494 h0.8
  text "/GPO 8 Opt" at 11.453,85.38 h0.8
  text "KEY" at 69.573,83.335 h0.6 r90
  text "(TG)" at 80.495,83.081 h0.6 r90
  text "(SS1)" at 74.653,82.7 h0.6 r90
  text "(SS2" at 77.072,82.657 h0.6 r90
  text "Radiation" at 83.035,81.303 h0.6 r90
  text "Sub System 1" at 73.31,80.795 h0.6 r90
  text "Sub System 2" at 75.73,80.752 h0.6 r90
  text "Payload 1 (P1)" at 70.787,80.668 h0.55 r90
  text "General (GEN" at 78.082,80.668 h0.6 r90
  text "Thermal Grid" at 79.479,80.668 h0.6 r90
  text "Camera (CAM)" at 81.637,80.591 h0.6 r90
  text "Payload 2 (P2)" at 72.184,80.541 h0.55 r90
  text "Payload (RAD)" at 84.359,80.414 h0.6 r90
  text "5V LUP" at 76.331,72.309 h0.6 r90
  text "3V3 LUP" at 56.746,72.286 h0.6 r90
  text "5V LUP" at 78.891,72.248 h0.6 r90
  text "5V LUP" at 81.431,72.248 h0.6 r90
  text "5V LUP" at 83.971,72.248 h0.6 r90
  text "5V LUP" at 86.511,72.248 h0.6 r90
  text "5V LUP" at 89.051,72.248 h0.6 r90
  text "3V3 LUP" at 59.313,72.182 h0.6 r90
  text "3V3 LUP" at 61.726,72.182 h0.6 r90
  text "3V3 LUP" at 64.266,72.182 h0.6 r90
  text "3V3 LUP" at 66.806,72.182 h0.6 r90
  text "3V3 LUP" at 69.346,72.182 h0.6 r90
  text "GND" at 18.9,69.746 h0.6 r90
  text "P2 RX/NCS" at 21.44,69.746 h0.6 r90
  text "P2 TX/SCK" at 23.98,69.746 h0.6 r90
  text "P2 RTS/MISO" at 29.06,69.746 h0.6 r90
  text "P2 CTS/MOSI" at 26.441,69.674 h0.6 r90
  text "P2_RTS/MISO" at 35.544,69.583 h0.6 r90
  text "GND" at 45.678,69.561 h0.6 r90
  text "P2_CTS/MOSI" at 38.14,69.527 h0.6 r90
  text "P2_TX/SCK" at 40.734,69.507 h0.6 r90
  text "CS TG" at 43.193,69.483 h0.6 r90
  text "5V LUP" at 92.814,69.365 h0.8 r90
  text "3V3 LUP" at 73.383,69.238 h0.8 r90
  text "CAM PAYLOAD" at 32.616,66.825 h0.8 r90
  text "TG PAYLOAD" at 49.38,66.825 h0.8 r90
  text "GND" at 71.105,63.545 h0.6 r90
  text "GND" at 56.922,63.38 h0.6 r90
  text "GND" at 88.123,63.291 h0.6 r90
  text "RS-485 A" at 62.195,60.503 h0.6 r90
  text "SS2" at 58.651,60.475 h0.6 r90
  text "RS-485 B" at 59.54,60.475 h0.6 r90
  text "SS2" at 61.318,60.475 h0.6 r90
  text "2 RS-485" at 66.944,60.399 h0.8 r90
  text "SUB SYSTEM" at 65.636,60.348 h0.8 r90
  text "P2 TX/SCK" at 82.908,59.586 h0.6 r90
  text "P2 RX/NCS" at 85.448,59.586 h0.6 r90
  text "SS1 SCL I2C" at 73.891,58.824 h0.6 r90
  text "SS1 SDA I2C" at 76.304,58.824 h0.6 r90
  text "PAYLOAD 2 UART" at 91.925,57.554 h0.8 r90
  text "I2C Header" at 80.114,57.427 h0.8 r90
  text "P2_TX/SCK" at 24.097,56.807 h0.6 r90
  text "P2_CTS/MOSI" at 26.764,56.807 h0.6 r90
  text "P2_RTS/MISO" at 29.304,56.807 h0.6 r90
  text "GND" at 19.16,56.773 h0.6 r90
  text "CS RAD" at 21.779,56.755 h0.6 r90
  text "P2_RTS/MISO" at 35.31,56.411 h0.6 r90
  text "P2_CTS/MOSI" at 37.977,56.411 h0.6 r90
  text "P2_TX/SCK" at 40.517,56.411 h0.6 r90
  text "CS TG" at 43.03,56.411 h0.6 r90
  text "P2_RX/NCS" at 45.597,56.411 h0.6 r90
  text "CS RAD" at 48.11,56.411 h0.6 r90
  text "GND" at 50.65,56.411 h0.6 r90
  text "3V3 BUS" at 2.898,54.76 h0.8 r90
  text "BCR OUT" at 57.236,54.099 h0.6 r90
  text "BAT RAW" at 59.732,54.046 h0.6 r90
  text "BCR OUT" at 62.08,53.998 h0.6 r90
  text "BAT RAW" at 64.747,53.998 h0.6 r90
  text "LOGIC PROBE" at 53.952,53.871 h0.8 r90
  text "RAD PAYLOAD" at 32.682,53.839 h0.8 r90
  text "GND" at 82.535,51.226 h0.6 r90
  text "BATTERY" at 68.557,51.077 h0.8 r90
  text "SS1 TX UART" at 77.193,46.505 h0.6 r90
  text "SS1 RX UART" at 79.86,46.505 h0.6 r90
  text "SYSTEM 1 UART" at 86.337,45.616 h0.8 r90
  text "GND" at 55.476,44.346 h0.6 r90
  text "GND" at 70.208,44.346 h0.6 r90
  text "3V3 BUS" at 35.664,43.457 h0.8 r90
  text "V RTC BUS" at 67.668,40.79 h0.6 r90
  text "UART CTS Opt" at 40.986,40.248 h0.6 r90
  text "GEN TX UART" at 48.891,40.25 h0.6 r90
  text "GND" at 38.683,40.238 h0.6 r90
  text "UART RTS Opt" at 43.846,40.155 h0.6 r90
  text "GEN RX UART" at 46.586,40.155 h0.6 r90
  text "P1 RS-485 A" at 60.81,39.647 h0.6 r90
  text "P1 RS-485 B" at 57.909,39.634 h0.6 r90
  text "GND" at 84.948,38.907 h0.6 r90
  text "PAYLOAD 1" at 64.218,37.452 h0.8 r90
  text "V RTC BUS" at 74.057,37.398 h0.8 r90
  text "5V BUS" at 35.664,37.361 h0.8 r90
  text "GENERAL UART" at 52.555,37.361 h0.8 r90
  text "5V BUS" at 77.193,37.234 h0.6 r90
  text "SS1 SCL I2C" at 79.86,34.313 h0.6 r90
  text "SS1 SDA I2C" at 82.339,34.301 h0.6 r90
  text "Release Connector" at 89.798,33.2 h0.8 r90
  text "UHF Antenna" at 88.588,33.173 h0.8 r90
  text "5V BUS" at 2.771,32.789 h0.8 r90
  text "GND" at 30.76,30.899 h0.6 r90
  text "A" at 55.372,28.899 h0.6 r90
  text "B" at 57.732,28.879 h0.6 r90
  text "GEN RS-485" at 54.365,28.849 h0.6 r90
  text "GEN RS-485" at 56.725,28.829 h0.6 r90
  text "P1 TX UART" at 42.331,28.806 h0.6 r90
  text "P1 RX UART" at 45.089,28.75 h0.6 r90
  text "P2 RS-485 A" at 19.154,28.725 h0.6 r90
  text "P2 RS-485 B" at 21.821,28.725 h0.6 r90
  text "GND" at 24.361,28.725 h0.6 r90
  text "GND" at 59.462,28.74 h0.6 r90
  text "GND" at 47.524,28.613 h0.6 r90
  text "P1 SDA I2C" at 35.879,26.891 h0.6 r90
  text "P1 SCL I2C" at 33.378,26.82 h0.6 r90
  text "RS-485" at 64.747,25.808 h0.8 r90
  text "I2C Header" at 39.408,25.775 h0.8 r90
  text "GENERAL" at 63.378,25.786 h0.8 r90
  text "PAYLOAD 1 UART" at 51.412,25.169 h0.8 r90
  text "PAYLOAD 2 RS-485" at 27.917,24.026 h0.8 r90
  text "GND" at 77.701,21.486 h0.6 r90
  text "CAN HIGH" at 24.361,17.549 h0.6 r90
  text "CAN LOW" at 21.631,17.537 h0.6 r90
  text "GND" at 19.036,17.497 h0.6 r90
  text "GND" at 77.75,16.04 h0.6 r90
  text "CAN_BUS" at 27.911,14.628 h0.8 r90
  text "GND" at 92.974,13.063 h0.8 r90
  text "EN UHF" at 34.44,8.913 h0.8
  text "EN OBC 2" at 76.223,8.913 h0.8
  text "Opt" at 83.208,8.926 h0.8
  text "EN OBC 1" at 50.706,8.786 h0.8
  text "GPO 6" at 66.063,8.786 h0.8
  text "GNSS PPS" at 11.58,8.278 h0.8
  text "GPO 8" at 19.2,8.278 h0.8
  text "CS TG" at 26.82,8.278 h0.8
  text "CS RAD" at 43.203,8.278 h0.8
  text "EN UHF" at 58.316,8.151 h0.8
  text "Opt" at 34.44,7.656 h0.8
  text "/GPO6" at 50.452,7.516 h0.8
  text "Opt" at 55.151,7.529 h0.8
  text "/EN OBC 1" at 65.809,7.389 h0.8
  text "Opt" at 73.175,7.402 h0.8
  text "GPO 7 Opt" at 76.223,7.402 h0.8
Board Outline:
  lines w0.254: 0,76.962 0.127,76.962 ; 0,0 97.663,0 97.6,0.063 97.6,90.297 0,90.297 0,0